# EAGLE board TQFO44-0mm8 (EAGLE 6.4)
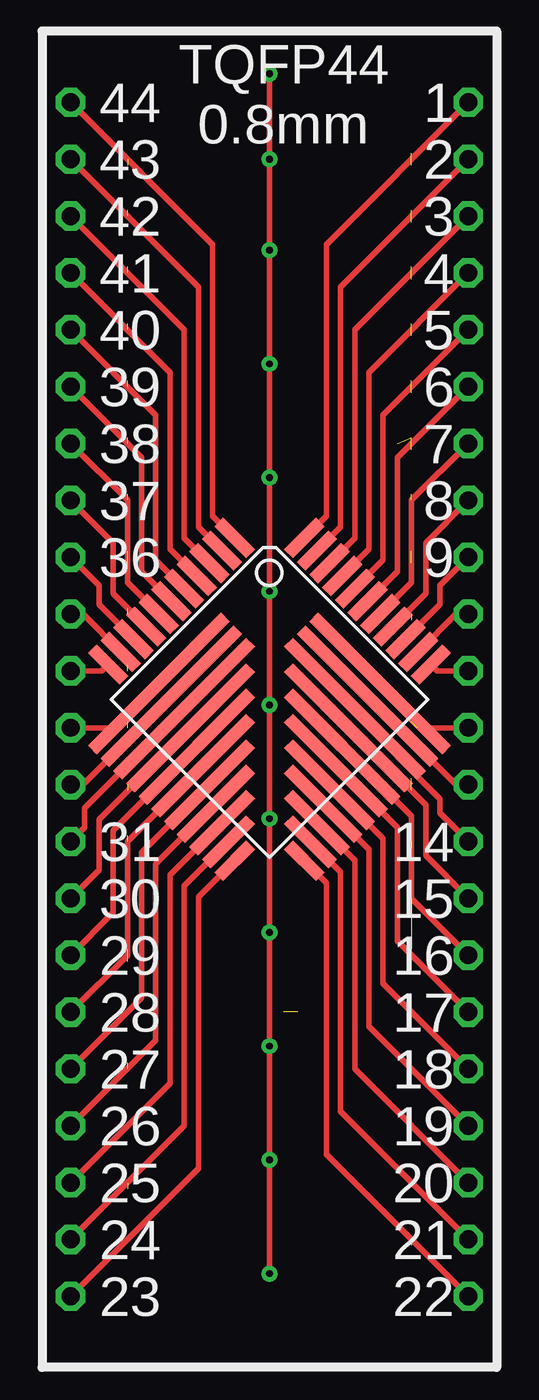
[diagram p0: board, top side]
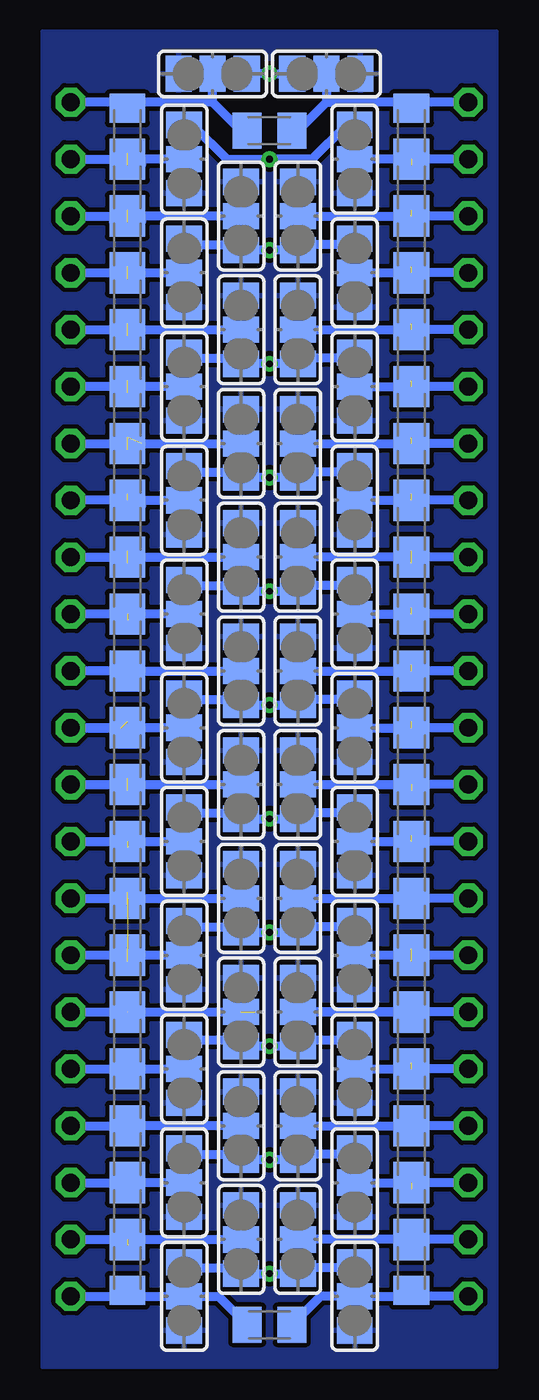
[diagram p1: board, bottom side, seen from below]

No outline drawn. Coordinates in mm, seen from the top.
Copper layers (1*16): Top 0.035mm / dielectric 1.5mm / Bottom 0.035mm
Design rules "default": minimum track width 10mil, minimum drill 0.6mm, track to track 8mil, track to pad 8mil, pad to pad 8mil, via to via 8mil, smd to smd 8mil, copper to edge 40mil, drill to drill 8mil, minimum pad ring 10mil, minimum via ring 8mil, stop-mask expansion 4mil, vias tented up to drill 0mil, thermal gap 10mil
Net classes: 1 pwr: width 0.254 mm

## Footprints (pad centres in the part's own frame; a part is rotated, then mirrored left to right if it is on the bottom)
1 = drill 0.8 octagon: P$1 0,0
SJ_2 = smd 1.168 x 1.6: 1 -1.524,0; 2 0,0; 3 1.524,0
C0805K = smd 1.3 x 1.6: 1 -1,0; 2 1,0
TQFP44 = smd 2 x 0.55: 1 -6.2,4; 2 -6.2,3.2; 3 -6.2,2.4; 4 -6.2,1.6; 5 -6.2,0.8; 6 -6.2,0; 7 -6.2,-0.8; 8 -6.2,-1.6; 9 -6.2,-2.4; 10 -6.2,-3.2; 11 -6.2,-4; 23 6.2,-4 | smd 0.55 x 8.4: 12 -4,-3; 13 -3.2,-3; 14 -2.4,-3 | smd 0.55 x 7.6: 15 -1.6,-3.4 | smd 0.55 x 6.8: 16 -0.8,-3.8 | smd 0.55 x 6: 17 0,-4.2 | smd 0.55 x 5.2: 18 0.8,-4.6 | smd 0.55 x 4.4: 19 1.6,-5 | smd 0.55 x 3.6: 20 2.4,-5.4 | smd 0.55 x 2.8: 21 3.2,-5.8 | smd 0.55 x 2: 22 4,-6.2; 34 4,6.2; 35 3.2,6.2; 36 2.4,6.2; 37 1.6,6.2; 38 0.8,6.2; 39 0,6.2; 40 -0.8,6.2; 41 -1.6,6.2; 42 -2.4,6.2; 43 -3.2,6.2; 44 -4,6.2 | smd 2.8 x 0.55: 24 5.8,-3.2 | smd 3.6 x 0.55: 25 5.4,-2.4 | smd 4.4 x 0.55: 26 5,-1.6 | smd 5.2 x 0.55: 27 4.6,-0.8 | smd 6 x 0.55: 28 4.2,0 | smd 6.8 x 0.55: 29 3.8,0.8 | smd 7.6 x 0.55: 30 3.4,1.6 | smd 8.4 x 0.55: 31 3,2.4; 32 3,3.2; 33 3,4

## Placement (x,y rotation side)
E$714  [1]  1.27,56.52 0 top
E$715  [1]  1.27,3.18 0 top
E$716  [1]  19.05,3.18 0 top
E$717  [SJ_2]  6.35,3.18 270 bottom
E$718  [SJ_2]  13.97,3.18 90 bottom
E$719  [C0805K]  3.81,4.45 90 bottom
E$720  [C0805K]  16.51,4.45 270 bottom
E$721  [C0805K]  10.16,1.91 180 bottom
E$724  [1]  1.27,5.72 0 top
E$725  [1]  1.27,8.26 0 top
E$726  [1]  1.27,10.8 0 top
E$727  [1]  1.27,13.34 0 top
E$728  [1]  1.27,15.88 0 top
E$730  [1]  1.27,18.42 0 top
E$731  [1]  1.27,20.96 0 top
E$732  [1]  1.27,23.5 0 top
E$733  [1]  1.27,26.04 0 top
E$734  [1]  1.27,28.58 0 top
E$735  [1]  1.27,31.12 0 top
E$736  [1]  1.27,33.66 0 top
E$737  [1]  1.27,36.2 0 top
E$738  [1]  1.27,38.74 0 top
E$739  [1]  1.27,41.28 0 top
E$740  [1]  1.27,43.82 0 top
E$741  [1]  1.27,46.36 0 top
E$742  [1]  1.27,48.9 0 top
E$743  [1]  1.27,51.44 0 top
E$744  [1]  1.27,53.98 0 top
E$745  [1]  19.05,56.52 0 top
E$755  [1]  19.05,5.72 0 top
E$756  [1]  19.05,8.26 0 top
E$757  [1]  19.05,10.8 0 top
E$758  [1]  19.05,13.34 0 top
E$759  [1]  19.05,15.88 0 top
E$761  [1]  19.05,18.42 0 top
E$762  [1]  19.05,20.96 0 top
E$763  [1]  19.05,23.5 0 top
E$764  [1]  19.05,26.04 0 top
E$765  [1]  19.05,28.58 0 top
E$766  [1]  19.05,31.12 0 top
E$767  [1]  19.05,33.66 0 top
E$768  [1]  19.05,36.2 0 top
E$769  [1]  19.05,38.74 0 top
E$770  [1]  19.05,41.28 0 top
E$771  [1]  19.05,43.82 0 top
E$772  [1]  19.05,46.36 0 top
E$773  [1]  19.05,48.9 0 top
E$774  [1]  19.05,51.44 0 top
E$775  [1]  19.05,53.98 0 top
E$776  [TQFP44]  10.16,29.84 315 top
E$784  [C0805K]  16.51,6.99 270 bottom
E$785  [C0805K]  16.51,12.07 270 bottom
E$792  [C0805K]  16.51,9.53 270 bottom
E$793  [C0805K]  16.51,14.61 270 bottom
E$794  [C0805K]  16.51,17.15 270 bottom
E$795  [C0805K]  16.51,19.69 270 bottom
E$796  [C0805K]  16.51,24.77 270 bottom
E$797  [C0805K]  16.51,29.85 270 bottom
E$798  [C0805K]  16.51,34.93 270 bottom
E$799  [C0805K]  16.51,40.01 270 bottom
E$800  [C0805K]  16.51,45.09 270 bottom
E$801  [C0805K]  16.51,50.17 270 bottom
E$802  [C0805K]  16.51,55.25 270 bottom
E$803  [C0805K]  16.51,22.23 270 bottom
E$804  [C0805K]  16.51,27.31 270 bottom
E$805  [C0805K]  16.51,32.39 270 bottom
E$806  [C0805K]  16.51,37.47 270 bottom
E$807  [C0805K]  16.51,42.55 270 bottom
E$808  [C0805K]  16.51,47.63 270 bottom
E$809  [C0805K]  16.51,52.71 270 bottom
E$810  [C0805K]  3.81,55.25 90 bottom
E$811  [C0805K]  3.81,50.17 90 bottom
E$812  [C0805K]  3.81,45.09 90 bottom
E$813  [C0805K]  3.81,40.01 90 bottom
E$814  [C0805K]  3.81,34.93 90 bottom
E$815  [C0805K]  3.81,29.85 90 bottom
E$816  [C0805K]  3.81,24.77 90 bottom
E$817  [C0805K]  3.81,19.69 90 bottom
E$818  [C0805K]  3.81,52.71 90 bottom
E$819  [C0805K]  3.81,47.63 90 bottom
E$820  [C0805K]  3.81,42.55 90 bottom
E$821  [C0805K]  3.81,37.47 90 bottom
E$822  [C0805K]  3.81,32.39 90 bottom
E$823  [C0805K]  3.81,27.31 90 bottom
E$824  [C0805K]  3.81,22.23 90 bottom
E$825  [C0805K]  3.81,17.15 90 bottom
E$827  [C0805K]  3.81,12.07 90 bottom
E$828  [C0805K]  3.81,6.99 90 bottom
E$834  [C0805K]  3.81,14.61 90 bottom
E$835  [C0805K]  3.81,9.53 90 bottom
E$841  [C0805K]  10.16,55.25 180 bottom
E$843  [SJ_2]  6.35,53.98 270 bottom
E$844  [SJ_2]  7.62,57.78 0 bottom
E$845  [SJ_2]  8.89,51.44 90 bottom
E$846  [SJ_2]  6.35,48.9 90 bottom
E$847  [SJ_2]  8.89,46.36 90 bottom
E$848  [SJ_2]  6.35,43.82 270 bottom
E$849  [SJ_2]  8.89,41.28 90 bottom
E$850  [SJ_2]  6.35,38.74 90 bottom
E$851  [SJ_2]  8.89,36.2 90 bottom
E$852  [SJ_2]  6.35,18.42 270 bottom
E$853  [SJ_2]  8.89,20.96 270 bottom
E$854  [SJ_2]  6.35,23.5 270 bottom
E$855  [SJ_2]  8.89,26.04 90 bottom
E$856  [SJ_2]  6.35,28.58 270 bottom
E$857  [SJ_2]  8.89,31.12 270 bottom
E$858  [SJ_2]  6.35,33.66 270 bottom
E$860  [SJ_2]  8.89,15.88 90 bottom
E$861  [SJ_2]  6.35,13.34 90 bottom
E$862  [SJ_2]  8.89,10.8 90 bottom
E$863  [SJ_2]  6.35,8.26 270 bottom
E$864  [SJ_2]  8.89,5.72 90 bottom
E$875  [SJ_2]  12.7,57.78 180 bottom
E$876  [SJ_2]  13.97,53.98 90 bottom
E$877  [SJ_2]  11.43,51.44 90 bottom
E$878  [SJ_2]  13.97,48.9 90 bottom
E$879  [SJ_2]  11.43,46.36 90 bottom
E$880  [SJ_2]  13.97,43.82 90 bottom
E$881  [SJ_2]  13.97,38.74 90 bottom
E$882  [SJ_2]  11.43,41.28 90 bottom
E$883  [SJ_2]  11.43,36.2 90 bottom
E$884  [SJ_2]  13.97,33.66 90 bottom
E$885  [SJ_2]  11.43,31.12 90 bottom
E$886  [SJ_2]  13.97,28.58 90 bottom
E$887  [SJ_2]  13.97,23.5 90 bottom
E$888  [SJ_2]  11.43,26.04 90 bottom
E$889  [SJ_2]  11.43,20.96 90 bottom
E$890  [SJ_2]  13.97,18.42 90 bottom
E$893  [SJ_2]  13.97,13.34 90 bottom
E$894  [SJ_2]  11.43,15.88 90 bottom
E$895  [SJ_2]  11.43,10.8 90 bottom
E$896  [SJ_2]  13.97,8.26 90 bottom
E$897  [SJ_2]  11.43,5.72 90 bottom

## Library data of the parts
E$714-E$716 E$724-E$728 E$730-E$745 E$755-E$759 E$761-E$776 = drill
E$717 E$718 E$843-E$858 E$860-E$864 E$875-E$890 E$893-E$897 = jumper
E$719-E$721 E$784 E$785 E$792-E$825 E$827 E$828 E$834 E$835 E$841 = ref-packages

## Nets
S$360 [pwr]: E$730.P$1 E$776.16 E$817.1 E$825.2 E$852.2
S$361 [pwr]: E$731.P$1 E$776.15 E$817.2 E$824.1 E$853.2
S$362 [pwr]: E$732.P$1 E$776.14 E$816.1 E$824.2 E$854.2
S$363 [pwr]: E$733.P$1 E$776.13 E$816.2 E$823.1 E$855.2
S$364 [pwr]: E$734.P$1 E$776.12 E$815.1 E$823.2 E$856.2
S$365 [pwr]: E$735.P$1 E$776.11 E$815.2 E$822.1 E$857.2
S$366 [pwr]: E$736.P$1 E$776.10 E$814.1 E$822.2 E$858.2
S$367 [pwr]: E$737.P$1 E$776.9 E$814.2 E$821.1 E$851.2
S$368 [pwr]: E$738.P$1 E$776.8 E$813.1 E$821.2 E$850.2
S$369 [pwr]: E$739.P$1 E$776.7 E$813.2 E$820.1 E$849.2
S$370 [pwr]: E$740.P$1 E$776.6 E$812.1 E$820.2 E$848.2
S$371 [pwr]: E$741.P$1 E$776.5 E$812.2 E$819.1 E$847.2
S$372 [pwr]: E$742.P$1 E$776.4 E$811.1 E$819.2 E$846.2
S$373 [pwr]: E$743.P$1 E$776.3 E$811.2 E$818.1 E$845.2
S$375: E$728.P$1 E$776.17 E$825.1 E$834.2 E$860.2
S$376 [pwr]: E$727.P$1 E$776.18 E$827.2 E$834.1 E$861.2
S$377 [pwr]: E$726.P$1 E$776.19 E$827.1 E$835.2 E$862.2
S$378 [pwr]: E$725.P$1 E$776.20 E$828.2 E$835.1 E$863.2
S$379 [pwr]: E$719.2 E$724.P$1 E$776.21 E$828.1 E$864.2
S$380 [pwr]: E$715.P$1 E$717.2 E$719.1 E$721.1 E$776.22
S$381 [pwr]: E$716.P$1 E$718.2 E$720.2 E$721.2 E$776.23
S$389 [pwr]: E$714.P$1 E$776.1 E$810.2 E$841.1 E$844.2
S$390 [pwr]: E$775.P$1 E$776.43 E$802.2 E$809.1 E$876.2
S$391 [pwr]: E$773.P$1 E$776.41 E$801.2 E$808.1 E$878.2
S$392 [pwr]: E$772.P$1 E$776.40 E$800.1 E$808.2 E$879.2
S$393 [pwr]: E$771.P$1 E$776.39 E$800.2 E$807.1 E$880.2
S$394 [pwr]: E$770.P$1 E$776.38 E$799.1 E$807.2 E$882.2
S$395 [pwr]: E$769.P$1 E$776.37 E$799.2 E$806.1 E$881.2
S$396 [pwr]: E$768.P$1 E$776.36 E$798.1 E$806.2 E$883.2
S$397 [pwr]: E$767.P$1 E$776.35 E$798.2 E$805.1 E$884.2
S$398 [pwr]: E$766.P$1 E$776.34 E$797.1 E$805.2 E$885.2
S$399 [pwr]: E$765.P$1 E$776.33 E$797.2 E$804.1 E$886.2
S$400 [pwr]: E$764.P$1 E$776.32 E$796.1 E$804.2 E$888.2
S$401 [pwr]: E$763.P$1 E$776.31 E$796.2 E$803.1 E$887.2
S$402 [pwr]: E$762.P$1 E$776.30 E$795.1 E$803.2 E$889.2
S$403 [pwr]: E$761.P$1 E$776.29 E$794.1 E$795.2 E$890.2
S$405 [pwr]: E$759.P$1 E$776.28 E$793.1 E$794.2 E$894.2
S$406 [pwr]: E$758.P$1 E$776.27 E$785.1 E$793.2 E$893.2
S$407 [pwr]: E$757.P$1 E$776.26 E$785.2 E$792.1 E$895.2
S$408 [pwr]: E$756.P$1 E$776.25 E$784.1 E$792.2 E$896.2
S$409 [pwr]: E$720.1 E$755.P$1 E$776.24 E$784.2 E$897.2
S$421 [pwr]: E$744.P$1 E$776.2 E$810.1 E$818.2 E$843.2
S$422 [pwr]: E$774.P$1 E$776.42 E$801.1 E$809.2 E$877.2
S$423 [pwr]: E$745.P$1 E$776.44 E$802.1 E$841.2 E$875.2
S$424 [pwr]: E$717.1 E$718.3 E$843.1 E$844.1 E$845.1 E$846.3 E$847.1 E$848.1 E$849.1 E$850.3 E$851.1 E$852.1 E$853.3 E$854.1 E$855.1 E$856.1 E$857.3 E$858.1 E$860.1 E$861.3 E$862.1 E$863.1 E$864.1 E$875.1 E$876.3 E$877.1 E$878.3 E$879.1 E$880.3 E$881.3 E$882.1 E$883.1 E$884.3 E$885.1 E$886.3 E$887.3 E$888.1 E$889.1 E$890.3 E$893.3 E$894.1 E$895.1 E$896.3 E$897.1
TQFPGND2 [pwr]: E$717.3 E$718.1 E$843.3 E$844.3 E$845.3 E$846.1 E$847.3 E$848.3 E$849.3 E$850.1 E$851.3 E$852.3 E$853.1 E$854.3 E$855.3 E$856.3 E$857.1 E$858.3 E$860.3 E$861.1 E$862.3 E$863.3 E$864.3 E$875.3 E$876.1 E$877.3 E$878.1 E$879.3 E$880.1 E$881.1 E$882.3 E$883.3 E$884.1 E$885.3 E$886.1 E$887.1 E$888.3 E$889.3 E$890.1 E$893.1 E$894.3 E$895.3 E$896.1 E$897.3

## Tracks (layer width: path | path; a pad name or v marks a point on that pad's centre or on a via)
S$360  (2 unrouted)
  Top 0.254: E$776.16 3.17,23.99 3.17,20.32 E$730.P$1
  Bottom 0.406: E$730.P$1 3.81,18.42 3.81,18.41 E$852.2
S$361
  Top 0.254: E$776.15 2.54,24.49 2.54,22.23 E$731.P$1
  Bottom 0.406: E$731.P$1 3.81,20.96 | 3.81,20.96 E$817.2 | E$853.2 3.81,20.96 | 3.81,20.96 E$824.1
S$362  (1 unrouted)
  Top 0.254: E$776.14 1.91,24.98 1.91,24.13 E$732.P$1
  Bottom 0.406: E$732.P$1 3.81,23.5 | E$854.2 3.81,23.5 | 3.81,23.5 E$824.2
S$363  (1 unrouted)
  Top 0.254: E$776.13 1.82,26.04 E$733.P$1
  Bottom 0.406: E$733.P$1 3.81,26.04 | E$855.2 3.81,26.04 | 3.81,26.04 E$823.1
S$364  (1 unrouted)
  Top 0.254: E$776.12 3.23,28.58 E$734.P$1
  Bottom 0.406: E$734.P$1 3.81,28.58 | E$856.2 3.81,28.58 | 3.81,28.58 E$823.2
S$365  (1 unrouted)
  Top 0.254: E$776.11 2.66,31.12 E$735.P$1
  Bottom 0.406: E$735.P$1 3.81,31.12 | E$857.2 3.81,31.12 | 3.81,31.12 E$815.2
S$366  (1 unrouted)
  Top 0.254: E$776.10 1.82,33.66 E$736.P$1
  Bottom 0.406: E$736.P$1 3.81,33.66 | E$858.2 3.81,33.66 | 3.81,33.66 E$822.2
S$367  (2 unrouted)
  Top 0.254: E$776.9 2.54,34.07 2.54,34.92 E$737.P$1
  Bottom 0.406: E$737.P$1 3.81,36.2 E$851.2
S$368  (1 unrouted)
  Top 0.254: E$776.8 3.17,34.57 3.17,36.83 E$738.P$1
  Bottom 0.406: 5.71,38.74 E$850.2 3.81,38.74 | E$738.P$1 3.81,38.74 | 3.81,38.74 E$821.2
S$369  (1 unrouted)
  Top 0.254: E$776.7 3.81,35.06 3.81,38.74 E$739.P$1
  Bottom 0.406: E$739.P$1 3.81,41.28 | E$849.2 3.81,41.28 | 3.81,41.28 E$813.2
S$370  (1 unrouted)
  Top 0.254: E$776.6 4.45,35.56 4.45,40.64 E$740.P$1
  Bottom 0.406: E$740.P$1 3.81,43.82 | E$848.2 3.81,43.82 | 3.81,43.82 E$820.2
S$371  (1 unrouted)
  Top 0.254: E$776.5 5.08,36.06 5.08,42.55 E$741.P$1
  Bottom 0.406: E$741.P$1 3.81,46.36 | E$847.2 3.81,46.36 | 3.81,46.36 E$812.2
S$372  (1 unrouted)
  Top 0.254: E$776.4 5.71,36.55 5.71,44.45 E$742.P$1
  Bottom 0.406: E$742.P$1 3.81,48.9 | E$846.2 3.81,48.9 | 3.81,48.9 E$819.2
S$373  (1 unrouted)
  Top 0.254: E$776.3 6.35,37.05 6.35,46.36 E$743.P$1
  Bottom 0.406: E$743.P$1 3.81,51.44 | E$845.2 3.81,51.44 | 3.81,51.44 E$811.2
S$375
  Top 0.254: E$776.17 3.81,23.5 3.81,18.42 E$728.P$1
  Bottom 0.406: E$728.P$1 3.81,15.88 | 3.81,15.88 E$834.2 | 3.81,15.88 E$860.2 3.81,15.88 E$825.1
S$376  (1 unrouted)
  Top 0.254: E$776.18 4.45,23 4.45,16.51 E$727.P$1
  Bottom 0.406: E$727.P$1 3.81,13.34 | E$861.2 3.81,13.34 | 3.81,13.34 E$827.2
S$377
  Top 0.254: E$776.19 5.08,22.5 5.08,14.61 E$726.P$1
  Bottom 0.406: E$726.P$1 3.81,10.8 | 3.81,10.8 E$835.2 | E$862.2 3.81,10.8 | 3.81,10.8 E$827.1
S$378  (1 unrouted)
  Top 0.254: E$776.20 5.71,22.01 5.71,12.7 E$725.P$1
  Bottom 0.406: E$725.P$1 3.81,8.26 | E$863.2 3.81,8.26 | 3.81,8.26 E$835.1
S$379
  Top 0.254: E$776.21 6.35,21.51 6.35,10.8 E$724.P$1
  Bottom 0.406: E$724.P$1 3.81,5.71 3.81,5.72 | 4.17,5.72 E$719.2 | E$828.1 3.81,5.72 | 3.81,5.72 4.17,5.72 | 4.17,5.72 E$864.2
S$380
  Top 0.254: E$776.22 6.99,21.01 6.99,8.89 E$715.P$1
  Bottom 0.406: E$721.1 7.89,3.18 E$717.2 4.08,3.18 E$719.1 3.81,3.18 E$715.P$1
S$381
  Top 0.254: E$716.P$1 12.7,9.53 12.7,21.65 E$776.23
  Bottom 0.406: E$721.2 12.43,3.18 E$718.2 16.51,3.18 | E$716.P$1 16.51,3.18 | 16.51,3.18 E$720.2
S$389
  Top 0.254: E$776.1 7.62,38.04 7.62,50.17 E$714.P$1
  Bottom 0.406: 6.35,56.52 7.62,56.52 E$844.2 | 6.35,56.52 7.62,56.52 8.89,55.24 E$841.1 | E$714.P$1 3.81,56.52 E$810.2 3.81,56.52 6.35,56.52
S$390  (2 unrouted)
  Top 0.254: E$775.P$1 13.34,48.26 13.34,37.55 E$776.43
  Bottom 0.406: E$876.2 15.88,53.98 15.88,53.71 E$809.1 | E$775.P$1 16.51,53.98
S$391  (2 unrouted)
  Top 0.254: E$773.P$1 14.61,44.45 14.61,36.55 E$776.41
  Bottom 0.406: E$773.P$1 16.51,48.9 E$878.2
S$392  (2 unrouted)
  Top 0.254: E$772.P$1 15.24,42.55 15.24,36.06 E$776.40
  Bottom 0.406: E$772.P$1 16.51,46.35 16.51,46.36 E$879.2
S$393  (2 unrouted)
  Top 0.254: E$771.P$1 15.88,40.64 15.88,35.56 E$776.39
  Bottom 0.406: E$880.2 16.51,43.81 16.51,43.82 E$771.P$1
S$394  (2 unrouted)
  Top 0.254: E$770.P$1 16.51,38.74 16.51,35.06 E$776.38
  Bottom 0.406: E$770.P$1 15.88,41.27 15.88,41.28 E$882.2
S$395  (1 unrouted)
  Top 0.254: E$769.P$1 17.14,36.83 17.14,34.57 E$776.37
  Bottom 0.406: E$881.2 15.88,38.73 15.88,38.47 E$806.1 16.51,38.74 E$769.P$1
S$396  (2 unrouted)
  Top 0.254: E$768.P$1 17.78,34.93 17.78,34.07 E$776.36
  Bottom 0.406: E$768.P$1 16.51,36.2 E$883.2
S$397  (2 unrouted)
  Top 0.254: E$767.P$1 18.5,33.66 E$776.35
  Bottom 0.406: E$884.2 16.51,33.66 | E$798.2 16.51,33.66 E$767.P$1
S$398
  Top 0.254: E$766.P$1 17.66,31.12 E$776.34
  Bottom 0.406: E$805.2 16.51,31.12 | 16.51,31.12 E$885.2 | E$797.1 16.51,31.12 | 16.51,31.12 E$766.P$1
S$399  (1 unrouted)
  Top 0.254: E$765.P$1 17.09,28.58 E$776.33
  Bottom 0.406: E$886.2 E$765.P$1 16.78,28.58 E$804.1
S$400  (2 unrouted)
  Top 0.254: E$764.P$1 18.5,26.04 E$776.32
  Bottom 0.406: 12.06,26.04 E$888.2 16.51,26.04 E$764.P$1
S$401  (1 unrouted)
  Top 0.254: E$763.P$1 17.78,24.77 17.78,25.4 13.98,29.2 E$776.31
  Bottom 0.406: E$763.P$1 16.51,23.5 | E$796.2 16.51,23.5 | 16.51,23.5 E$887.2
S$402  (2 unrouted)
  Top 0.254: E$762.P$1 17.14,22.86 17.14,25.12 E$776.30
  Bottom 0.406: E$762.P$1 16.51,20.95 16.51,20.96 E$889.2
S$403  (2 unrouted)
  Top 0.254: E$761.P$1 16.51,20.96 16.51,24.63 E$776.29
  Bottom 0.406: E$761.P$1 E$890.2
S$405  (2 unrouted)
  Top 0.254: E$759.P$1 15.88,19.05 15.88,24.13 E$776.28
  Bottom 0.406: 12.06,15.88 E$894.2 | E$759.P$1 16.51,15.88 E$793.1 | E$794.2 16.51,15.88 10.79,15.88
S$406
  Top 0.254: E$758.P$1 15.24,17.15 15.24,23.63 E$776.27
  Bottom 0.406: E$758.P$1 16.51,13.34 | 16.51,13.34 E$785.1 | E$793.2 16.51,13.34 | 16.51,13.34 E$893.2
S$407
  Top 0.254: E$757.P$1 14.61,15.24 14.61,23.14 E$776.26
  Bottom 0.406: E$757.P$1 16.51,10.8 | 16.51,10.8 E$792.1 | E$895.2 16.51,10.8 | 16.51,10.8 E$785.2
S$408
  Top 0.254: E$756.P$1 13.97,13.34 13.97,22.64 E$776.25
  Bottom 0.406: E$756.P$1 16.51,8.26 | E$896.2 16.51,8.26 | 16.51,8.26 E$792.2 | 16.51,8.26 E$784.1
S$409  (1 unrouted)
  Top 0.254: E$755.P$1 13.34,11.43 13.34,22.14 E$776.24
  Bottom 0.406: E$755.P$1 16.51,5.72 | 16.51,5.72 E$784.2 | 16.51,5.72 E$897.2
S$421  (1 unrouted)
  Top 0.254: E$776.2 6.99,37.55 6.99,48.26 E$744.P$1
  Bottom 0.406: E$810.1 3.81,53.98 | 3.81,53.98 E$843.2 | E$744.P$1 3.81,53.98
S$422  (1 unrouted)
  Top 0.254: E$774.P$1 13.97,46.36 13.97,37.05 E$776.42
  Bottom 0.406: E$774.P$1 17.14,51.44 17.14,51.17 E$801.1 15.88,51.17 15.88,51.44 E$877.2
S$423
  Top 0.254: E$745.P$1 12.7,50.17 12.7,38.04 E$776.44
  Bottom 0.406: 12.7,56.52 E$875.2 | 12.7,56.52 11.43,55.24 E$841.2 | 12.7,56.52 16.51,56.52 E$802.1 16.51,56.52 E$745.P$1
S$424  (via drill 0.3)
  Top 0.254: v10.16,4.19 v10.16,9.27 v10.16,14.35 10.16,19.94 10.15,19.31 v10.15,19.43 v10.15,24.51 v10.16,24.51 v10.16,29.59 v10.16,34.67 v10.16,39.75 v10.16,44.83 v10.16,49.91 v10.16,53.98 v10.16,57.78
  Bottom 0.406: E$863.1 6.73,9.78 6.99,9.53 8.64,9.53 E$862.1 v10.16,9.27 E$895.1 11.68,9.53 13.34,9.53 13.59,9.78 E$896.3 | E$861.3 6.73,14.86 6.99,14.61 8.64,14.61 E$860.1 v10.16,14.35 E$894.1 11.71,14.63 13.25,14.63 13.48,14.86 E$893.3 | E$852.1 6.73,19.94 6.99,19.69 8.64,19.69 E$853.3 v10.15,19.43 E$889.1 11.68,19.69 13.34,19.69 13.59,19.94 E$890.3 | E$887.3 13.59,25.02 13.34,24.77 11.68,24.77 E$888.1 v10.16,24.51 E$855.1 8.64,24.77 6.99,24.77 6.73,25.02 E$854.1 | E$856.1 6.73,30.1 6.99,29.85 8.64,29.85 E$857.3 v10.16,29.59 E$885.1 11.68,29.85 13.34,29.85 13.59,30.1 E$886.3 | E$858.1 6.73,35.18 6.99,34.93 8.64,34.93 E$851.1 v10.16,34.67 E$883.1 11.68,34.93 13.34,34.93 13.59,35.18 E$884.3 | E$881.3 13.59,40.26 13.34,40.01 11.68,40.01 E$882.1 v10.16,39.75 E$849.1 8.89,40.01 6.99,40.01 6.73,40.26 E$850.3 | E$848.1 6.73,45.34 6.99,45.09 8.64,45.09 E$847.1 v10.16,44.83 E$879.1 11.68,45.09 13.34,45.09 13.59,45.34 E$880.3 | E$845.1 9.53,49.91 | 9.53,49.91 v10.16,49.91 E$877.1 11.68,50.17 13.34,50.17 13.59,50.42 E$878.3 | E$846.3 6.73,50.42 6.99,50.17 9.27,50.17 9.53,49.91 | E$717.1 6.73,4.7 6.99,4.45 8.64,4.45 E$864.1 v10.16,4.19 E$897.1 11.68,4.45 13.34,4.45 13.59,4.7 E$718.3 | E$843.1 6.73,55.5 8.26,53.98 v10.16,53.98 12.06,53.98 13.59,55.5 E$876.3 | E$844.1 v10.16,57.78 E$875.1
TQFPGND2
  pour Bottom: 0,59.69 20.32,59.69 20.32,0 0,0

## Text on the board
tPlace: 44 | TQFP44 / 0.8mm | 1 | 43 | 2 | 42 | 3 | 41 | 4 | 40 | 5 | 39 | 6 | 38 | 7 | 37 | 8 | 36 | 9 | 31 | 14 | 30 | 15 | 29 | 16 | 28 | 17 | 27 | 18 | 26 | 19 | 25 | 20 | 24 | 21 | 23 | 22